# Altium PCB SAST_PCB_V2B_Test_Beta_Sensors_2.PcbDoc
Units mil, origin at the board's own origin, x right, y up, seen from the top; angles counter-clockwise.
Board outline 2500 x 2500 mil, 2 copper layers (Top Layer, Bottom Layer); 26 components, 19 nets, 101 pads, 5 vias.
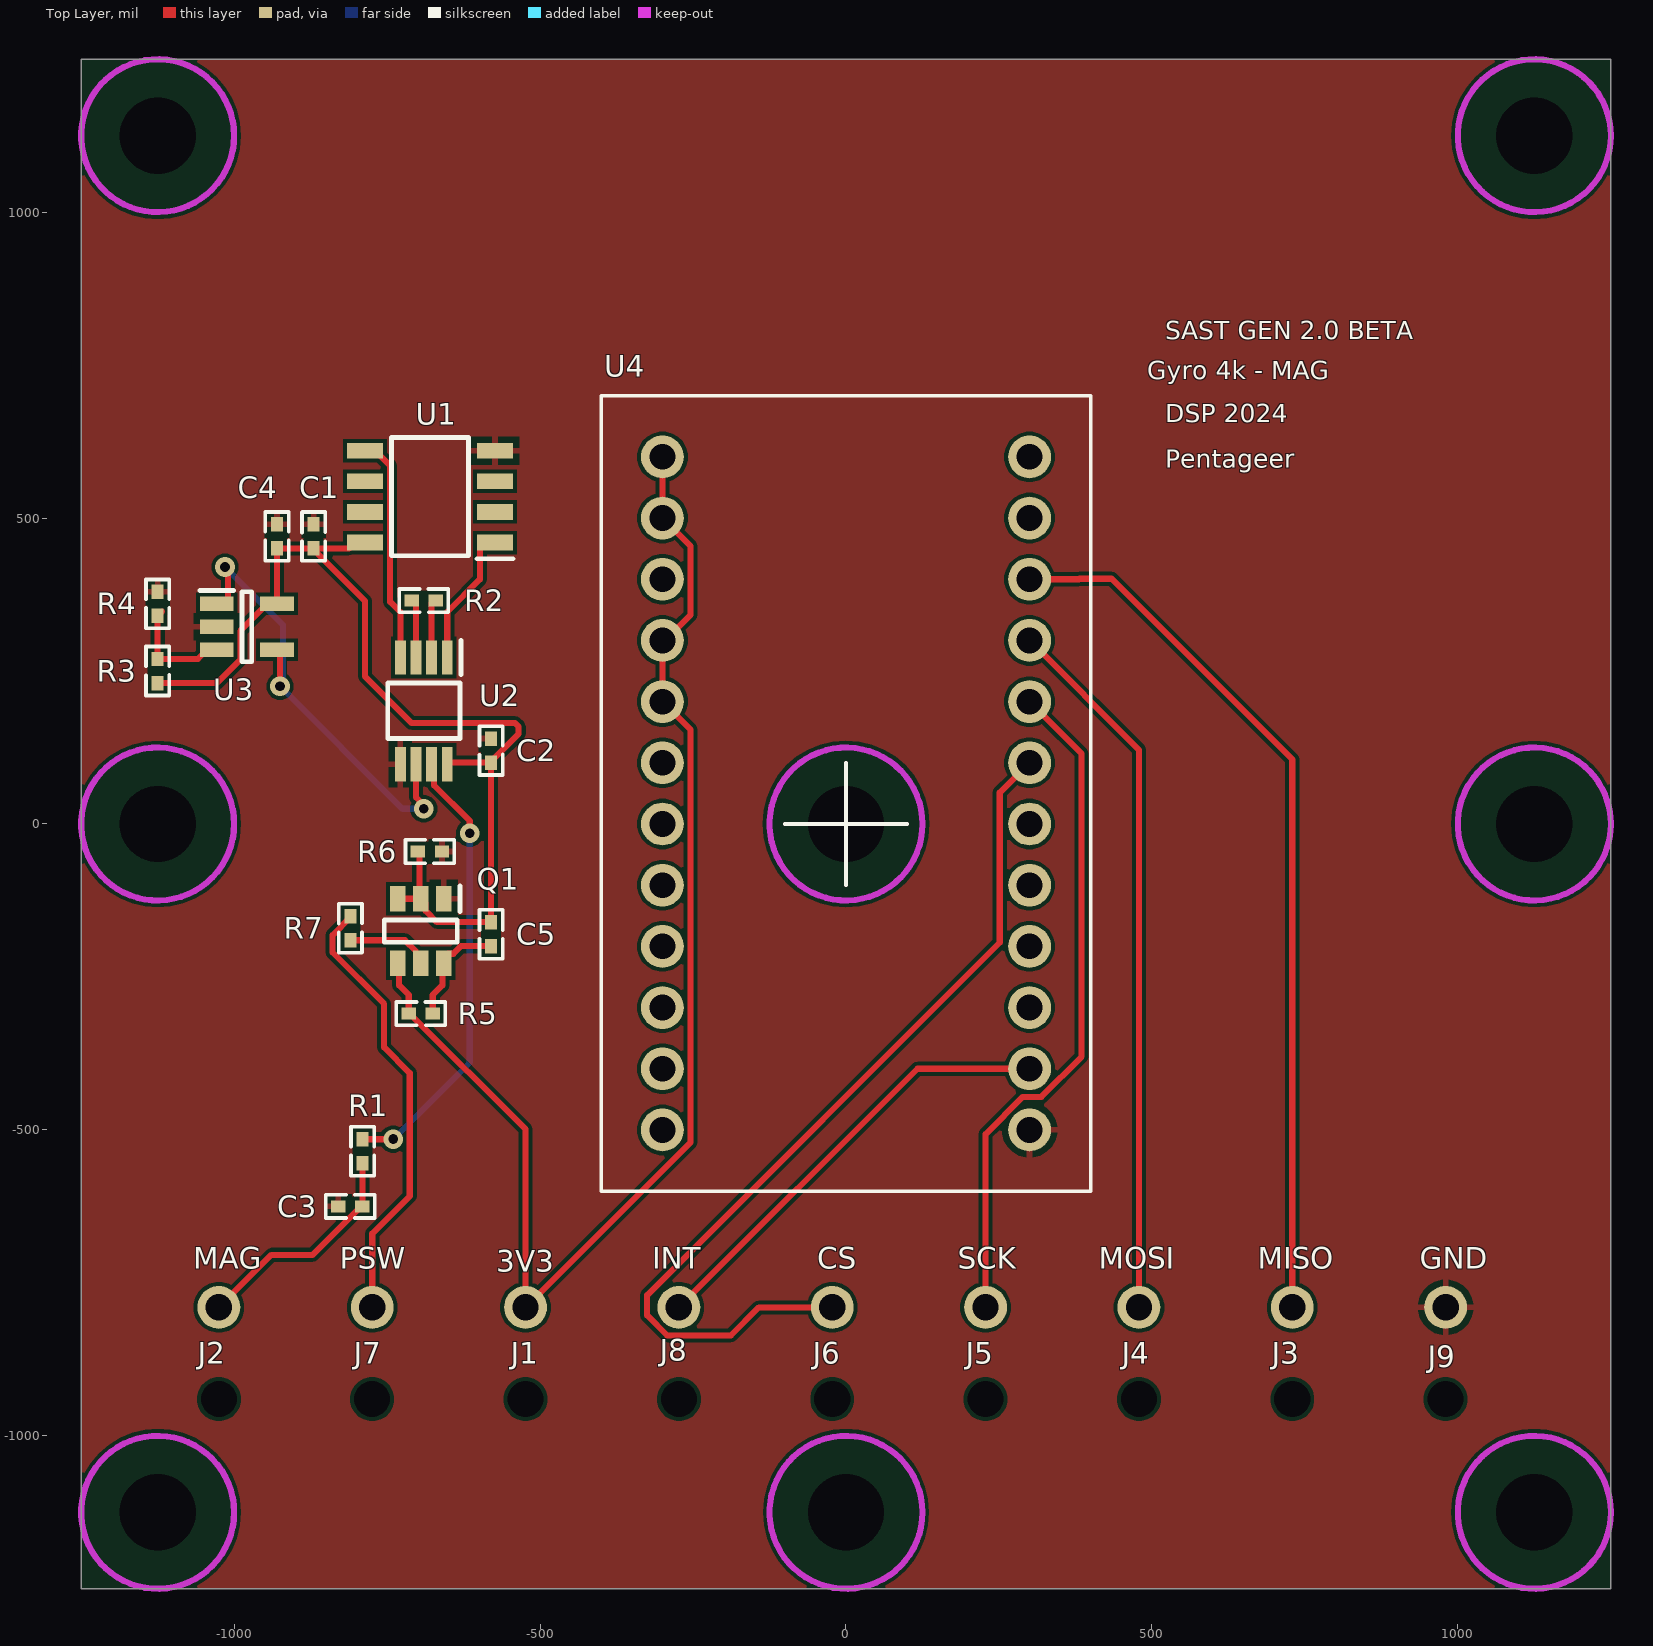
[diagram p0: Top Layer view]
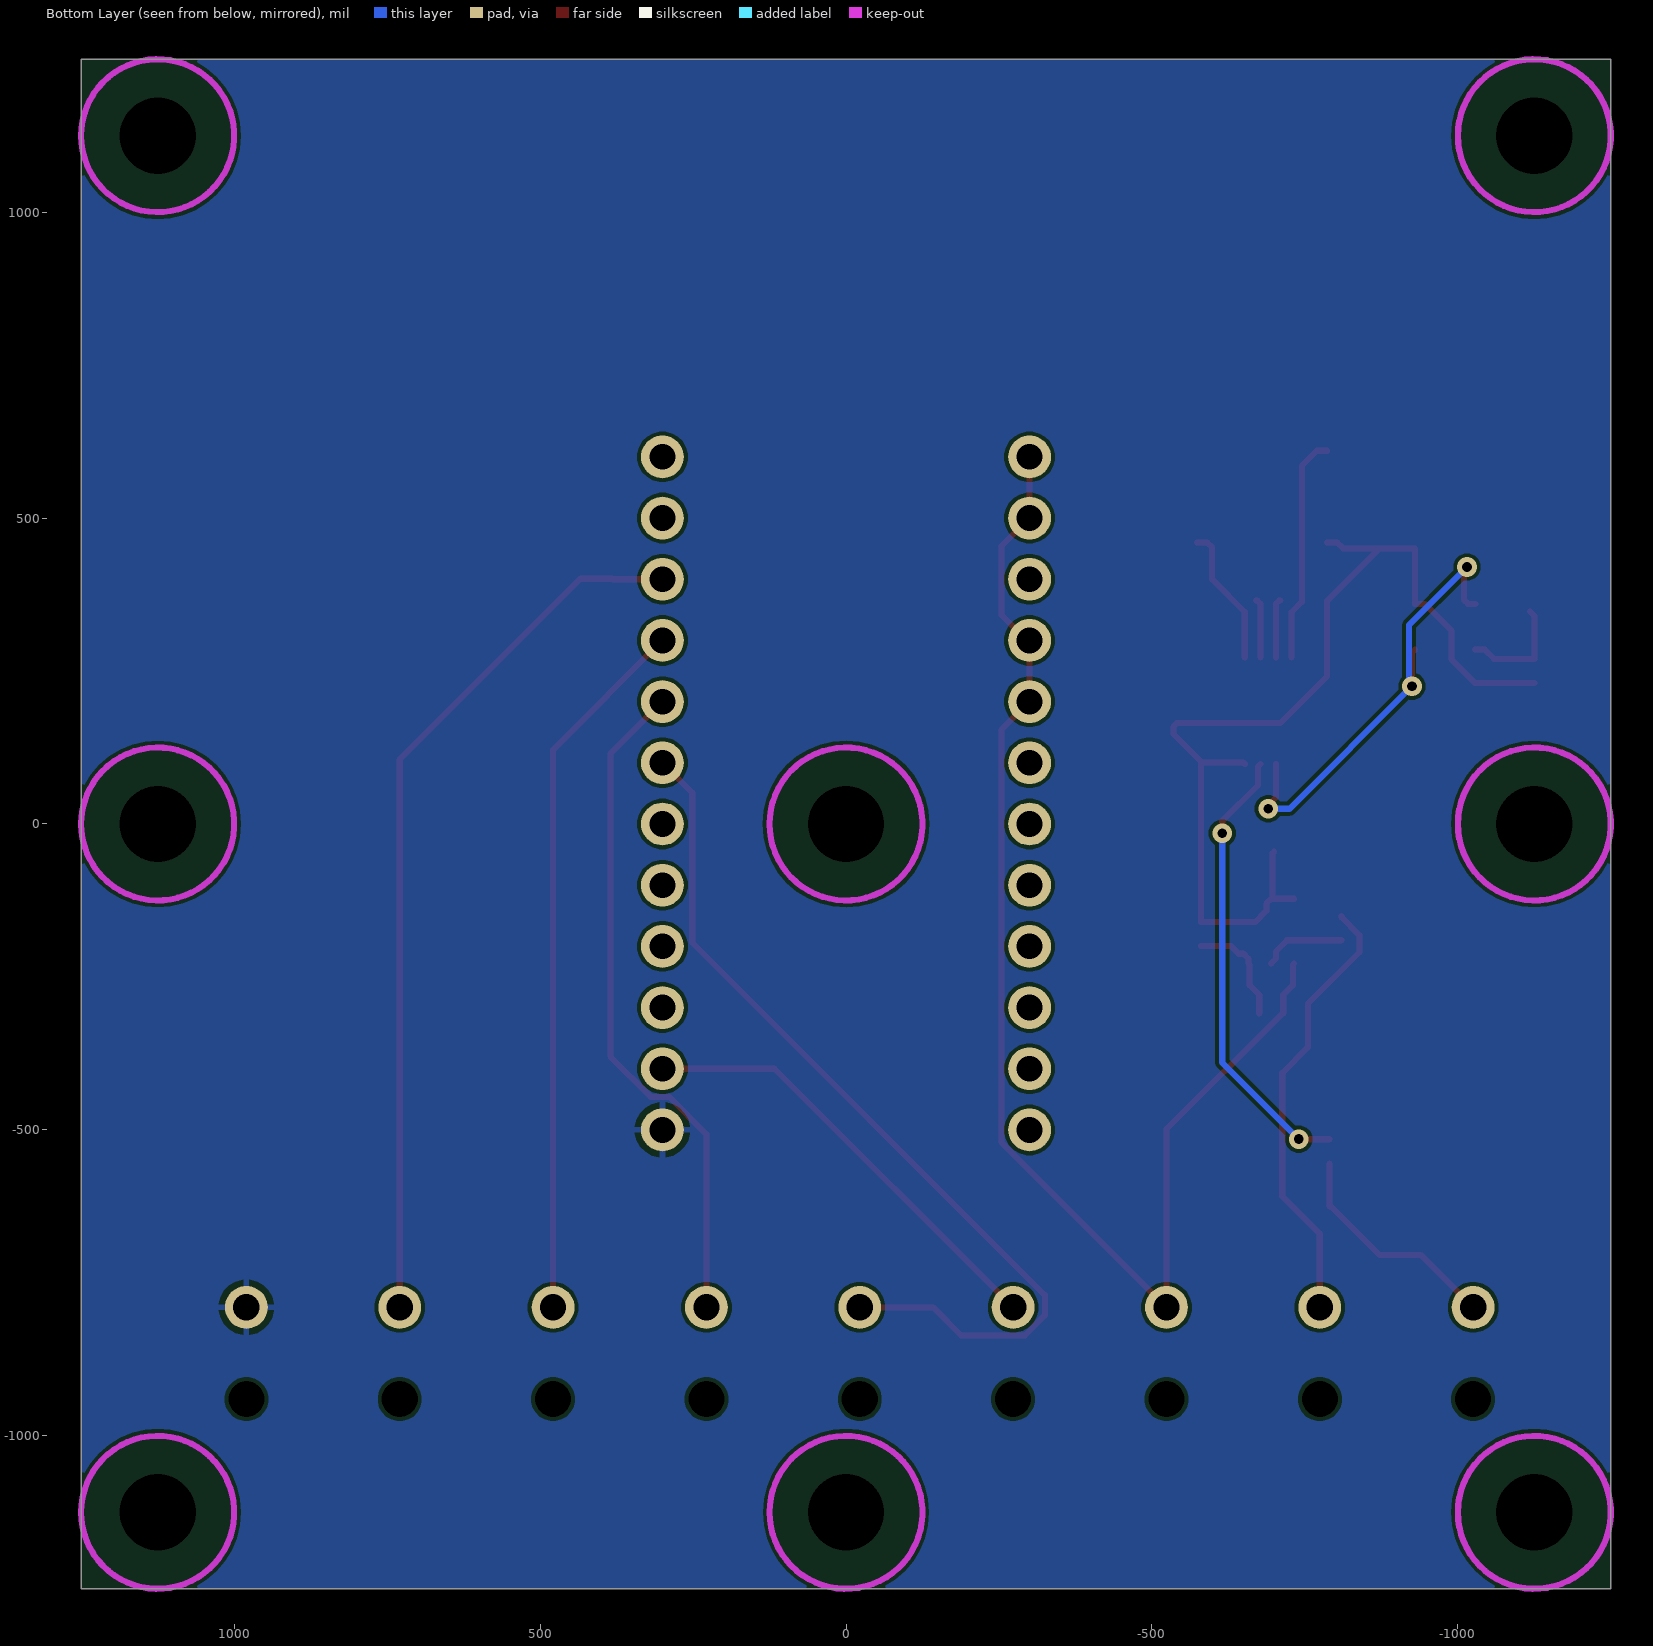
[diagram p1: Bottom Layer view, seen from below]

## Layer stack, top to bottom
Top Solder: solder mask 0.4, Solder Resist, Dk 3.5
Top Layer: signal copper 1.4
Dielectric 1: dielectric 12.6, FR-4, Dk 4.8
Bottom Layer: signal copper 1.4
Bottom Solder: solder mask 0.4, Solder Resist, Dk 3.5

## Board outline
-1250,-1250 -1250,1250 1250,1250 1250,-1250

## Design rules (kind name [scope] priority, off if disabled: settings)
Clearance [All] p1: gap=6 ignorepadtopadclearanceinfootprint=FALSE
HoleSize [All] p1: absolutevalues=TRUE maxlimit=150 minlimit=1 maxpercent=80.000 minpercent=20.000
MinimumSolderMaskSliver [All] p1: minsoldermaskwidth=4
PolygonConnect [All] p1: connectstyle=Relief reliefconductorwidth=10 reliefentries=4 polygonreliefangle="90 Angle" airgapwidth=10
RoutingVias [All] p1: holewidth=16 width=32 viastyle="Through Hole" minholewidth=12 minwidth=30 maxholewidth=28 maxwidth=50
SilkToSilkClearance [All] p1: silktosilkclearance=4
SilkToSolderMaskClearance [IsPad] p1: minsilkscreentomaskgap=4 clearancetoexposedcopper=TRUE
SolderMaskExpansion [All] p1: expansion=4 istentingtop=FALSE
Width [All] p1: maxlimit=10 minlimit=10 preferedwidth=10
26 further rules are at their usual default settings.

## Components (designator, comment, footprint, x,y, rotation, side; value= is the part's Value field where it differs from the comment)
C1 "CAP CER .1UF 10V X8M 0201" 0402_DSP -870,470 r270 top value=0.1uF
C2 "CAP CER .1UF 10V X8M 0201" 0402_DSP -580,120 r90 top value=0.1uF
C3 "CAP CER 1000PF 50V X8L 0402" 0402_DSP -810.32,-625 r0 top value=1000pF
C4 "CAP CER .1UF 10V X8M 0201" 0402_DSP -930,470 r90 top value=0.1uF
C5 "CAP CER 1000PF 50V X8L 0402" 0402_DSP -580,-180 r270 top value=1000pF
J1 "" Wire24Awg2x1HPAD -523.75,-790 r270 top
J2 "" Wire24Awg2x1HPAD -1025,-790 r270 top
J3 "" Wire24Awg2x1HPAD 729.38,-790 r270 top
J4 "" Wire24Awg2x1HPAD 478.75,-790 r270 top
J5 "" Wire24Awg2x1HPAD 228.12,-790 r270 top
J6 "" Wire24Awg2x1HPAD -22.5,-790 r270 top
J7 "" Wire24Awg2x1HPAD -774.38,-790 r270 top
J8 "" Wire24Awg2x1HPAD -273.12,-790 r270 top
J9 "" Wire24Awg2x1HPAD 980,-790 r270 top
Q1 "SI3865DDV-T1-GE3" SOP95P284X110-6N -695,-175 r270 top
R1 "" 0402_DSP -790,-535 r90 top value=20
R2 "" 0402_DSP -690,365 r0 top value=2.61k
R3 "0402" 0402_DSP -1125,250 r90 top value=100k
R4 "0402" 0402_DSP -1125,359.68 r90 top value=100k
R5 "" 0402_DSP -695,-310 r0 top value=100k
R6 "" 0402_DSP -680,-45 r180 top value=100k
R7 "" 0402_DSP -810,-170.32 r90 top value=3.3k
U1 "SENSOR Magnetometer WHEAT BRDG 8SOIC" SOIC127P600X175-8N -680,535 r180 top
U2 "IC INST AMP 1 CIRCUIT 8MSOP" SOP65P490X110-8N -690,185 r270 top
U3 "IC OPAMP GP 1 CIRCUIT SOT23-5" SOT95P270X145-5N -979.21,322.4 r0 top
U4 "ASM330LHHXG1TR_EVAL" ASM330LHHX_Eval 0,0 r0 top

## Footprints (in the part's own frame and the unit in brackets; to place one, negate y for a bottom-side part, rotate by r counter-clockwise, add the part's x,y. Pads: shape width x height; smd on the part's side, far side on the other; paste and mask are expansions set on the pad)
0402_DSP [mm]
  rect 0.6x0.5 smd: 1(-0.5,0) 2(0.5,0)
  silkscreen extent -1.02,-0.48 1.02,0.48, body extent -0.55,-0.3 0.55,0.3, height 1.3
ASM330LHHX_Eval [mil]
  round 70 hole 42: 1(-300,600) 2(-300,500) 3(-300,400) 4(-300,300) 5(-300,200) 6(-300,100) 7(-300,0) 8(-300,-100) 9(-300,-200) 10(-300,-300) 11(-300,-400) 12(-300,-500) 13(300,-500) 14(300,-400) 15(300,-300) 16(300,-200) 17(300,-100) 18(300,0) 19(300,100) 20(300,200) 21(300,300) 22(300,400) 23(300,500) 24(300,600)
  silkscreen extent -400,-600 400,700
SOIC127P600X175-8N [mm]
  rect 1.5x0.65 smd: 1(-2.7,1.905) 2(-2.7,0.635) 3(-2.7,-0.635) 4(-2.7,-1.905) 5(2.7,-1.905) 6(2.7,-0.635) 7(2.7,0.635) 8(2.7,1.905)
  silkscreen extent -3.45,-2.45 1.6,2.58, body extent -3,-2.45 3,2.45, height 1.75
SOP65P490X110-8N [mm]
  rect 1.425x0.45 smd: 1(-2.212,0.975) 2(-2.212,0.325) 3(-2.212,-0.325) 4(-2.212,-0.975) 5(2.212,-0.975) 6(2.212,-0.325) 7(2.212,0.325) 8(2.212,0.975)
  silkscreen extent -2.93,-1.5 1.15,1.55, body extent -2.45,-1.5 2.45,1.5, height 1.1
SOP95P284X110-6N [mm]
  rect 1.062x0.65 smd mask+0.076: 1(-1.344,0.95) 2(-1.344,0) 3(-1.344,-0.95) 4(1.344,-0.95) 5(1.344,0) 6(1.344,0.95)
  silkscreen extent -1.88,-1.51 0.46,1.63, body extent -1.42,-1.51 1.42,1.51, height 1.1
SOT95P270X145-5N [mm]
  rect 1.4x0.6 smd: 1(-1.25,0.95) 2(-1.25,0) 3(-1.25,-0.95) 4(1.25,-0.95) 5(1.25,0.95)
  silkscreen extent -1.95,-1.45 0.2,1.5, body extent -1.35,-1.45 1.35,1.45, height 1.45
Wire24Awg2x1HPAD [mil]
  round 70 hole 43: 1(0,0)
  round 0 hole 59 unplated: ""(150,0)

## Part data
C1 C2 C4: library part GCM033M8ED104KE07J, "Capacitor: 0.1 µF ±10% 10V Ceramic Capacitor X8M 0201", Case/Package=0402, Manufacturer_Name="Murata Electronics", Mouser Part Number=81-GCM033M8ED104KE07, Voltage=10V, Datasheet Link=https://search.murata.co.jp/Ceramy/image/img/A01X/G101/ENG/GCM033M8ED104KE07-01A.pdf, Height=0.33mm, Manufacturer_Part_Number=GCM033M8ED104KE07J, Mouser Price/Stock=https://www.mouser.co.uk/ProductDetail/Murata-Electronics/GCM033M8ED104KE07J?qs=xZFQr2mActesc5d29hjXRw%3D%3D
C3 C5: library part GCM155L81H102KA37D, "Capacitor: 1000 pF ±10% 50V Ceramic Capacitor X8L 0402 (1005 Metric)", Case/Package=0402, Manufacturer_Name="Murata Electronics", Mouser Part Number=81-GCM155L81H102KA7D, Voltage=50V, Arrow Part Number=GCM155L81H102KA37D, Arrow Price/Stock=https://www.arrow.com/en/products/gcm155l81h102ka37d/murata-manufacturing?region=nac, Datasheet Link=https://componentsearchengine.com/Datasheets/2/GCM155L81H102KA37D.pdf, Height=0.55mm, Manufacturer_Part_Number=GCM155L81H102KA37D, Mouser Price/Stock=https://www.mouser.co.uk/ProductDetail/Murata-Electronics/GCM155L81H102KA37D?qs=ui%252B2d9lVEI6nM018NUOqBg%3D%3D
J1 J2 J3 J4 J5 J6 J7 J8 J9: library part Socket, "Socket", LatestRevisionDate=17-Jul-2002, LatestRevisionNote="Re-released for DXP Platform.", Publisher="Altium Limited"
Q1: "Transistor", Manufacturer_Name=Vishay, Mouser Part Number=78-SI3865DDV-T1-GE3, Arrow Part Number=SI3865DDV-T1-GE3, Arrow Price/Stock=https://www.arrow.com/en/products/si3865ddv-t1-ge3/vishay, Datasheet Link=https://componentsearchengine.com/Datasheets/2/SI3865DDV-T1-GE3.pdf, Height=1.1mm, Manufacturer_Part_Number=SI3865DDV-T1-GE3, Mouser Price/Stock=https://www.mouser.co.uk/ProductDetail/Vishay-Semiconductors/SI3865DDV-T1-GE3?qs=vuqggo%252BeDiBbC6kpjqT%2F2w%3D%3D
R1: library part "Resistor 0402", Case/Package=0402, Manufacturer_Name="Vishay / Dale", Supplier_Name=Mouser
R2: library part "Resistor 0402", Case/Package=0402
R3 R4: library part "Resistor 0402", Manufacturer_Name="Vishay / Dale", Tolerance=0.1%, Supplier_Name=Mouser
R5 R6 R7: library part "Resistor 0402", Case/Package=0402, Manufacturer_Name="Vishay / Dale", Manufacturer_Part_Number=CRCW0402100KFKEDC, Supplier_Name=Mouser, Supplier_Part_Number=71-CRCW0402100KFKEDC
U1: library part AAH002-02E, "Integrated Circuit: Magnetoresistive Sensor Single Axis 8-SOIC", Manufacturer_Part_Name="NVE Corp/Sensor Products", Manufacturer_Part_Number=AAH002-02E, Supplier=Digikey, Supplier_Part_Number=391-1046-5-ND
U2: library part AD8226BRMZ-R7, "Integrated Circuit: Instrumentation Amplifier 1 Circuit Rail-to-Rail 8-MSOP", Manufacturer_Name="Analog Devices", Mouser Part Number=584-AD8226BRMZ-R7, Arrow Part Number=AD8226BRMZ-R7, Arrow Price/Stock=https://www.arrow.com/en/products/ad8226brmz-r7/analog-devices?region=nac, Datasheet Link=https://componentsearchengine.com/Datasheets/1/AD8226BRMZ-R7.pdf, Height=1.1mm, Manufacturer_Part_Number=AD8226BRMZ-R7, Mouser Price/Stock=https://www.mouser.co.uk/ProductDetail/Analog-Devices/AD8226BRMZ-R7?qs=%2FtpEQrCGXCy0K1MIqqlxxw%3D%3D
U3: library part MCP6401T-E_OT, "Integrated Circuit: General Purpose Amplifier 1 Circuit Rail-to-Rail SOT-23-5", Arrow Part Number=MCP6401T-E/OT, Manufacturer_Name=Microchip, Mouser Part Number=579-MCP6401T-E/OT, Arrow Price/Stock=https://www.arrow.com/en/products/mcp6401t-eot/microchip-technology?region=nac, Datasheet Link=https://componentsearchengine.com/Datasheets/2/MCP6401T-E_OT.pdf, Height=1.45mm, Manufacturer_Part_Number=MCP6401T-E/OT, Mouser Price/Stock=https://www.mouser.co.uk/ProductDetail/Microchip-Technology-Atmel/MCP6401T-E-OT?qs=bxUt0k7cytKn2ZddhA6TyA%3D%3D

## Free pads (board coordinates)
  round 0 hole 125 unplated: ""(-1125,-1125) ""(-1125,0) ""(-1125,1125) ""(0,-1125) ""(0,0) ""(1125,-1125) ""(1125,0) ""(1125,1125)

## Via types
v1: diameter 32, hole 16, Top Layer to Bottom Layer, tented both sides, 5 vias

## Nets (pads, with @x,y where several pads share a name; then routed paths per layer and width w, separated by ;. In a path a pad name is that pad's centre, name@x,y a point inside that pad or via, vN(x,y) a via of type N, cw(c..) or ccw(c..) an arc to the next point about the centre after c; other vN are vias at no path point)
3V3: J1.1 Q1.4 R5.1 U4.1 U4.2 U4.4 U4.5 | length 2211
  Top Layer w10: Q1.4 -730.31,-230 -730.31,-263.82 -714.68,-279.45 R5.1 -712.72,-310 -523.75,-498.97 J1.1 -254,-520.25 -254,154 U4.5 U4.4 -295.77,300 -254,341.77 -254,454 U4.2 U4.1
3V3_MAG_2: C1.2 C2.1 C4.1 C5.1 Q1.2 Q1.3 R3.1 R6.2 U1.8 U2.8 U3.5 | length 1708.4
  Top Layer w10: R3.1 -1028.18,230.32 -989.87,268.63 -989.87,315.69 -945.75,359.8 U3.5 C4.1 C1.2 ; U1.8 -803.03,460 -812.72,450.31 C1.2 ; Q1.3 Q1.2 ; R6.2 -697.34,-47.34 -697.34,-119.74 Q1.2 ; U2.8 -649.21,100.32 C2.1 ; C1.2 -870,448.35 -786.3,364.65 -786.3,241.3 -710,165 -540.86,165 -535,159.14 -535,147.28 -580,102.28 C2.1 ; Q1.2 -687.2,-129.88 -687.2,-141.74 -668.63,-160.32 C5.1 C2.1
CS_4K_Gyro: J6.1 U4.19 | length 1497.2
  Top Layer w10: J6.1 -142.46,-790 -188.46,-836 -292.18,-836 -325,-803.18 -325,-770 251.33,-193.67 251.33,51.33 U4.19
GND: C1.1 C2.2 C3.1 C4.2 J9.1 Q1.1 R4.2 R6.1 U1.4 U2.5 U3.2 U4.13
Int_4K_Gyro: J8.1 U4.14 | length 734.7
  Top Layer w10: J8.1 116.88,-400 U4.14
MAG_ANAL_2: C3.2 J2.1 R1.1 | length 373.3
  Top Layer w10: J2.1 -939.18,-704.18 -871.78,-704.18 -792.6,-625 C3.2 -790.32,-624.69 -790.32,-555 R1.1
MISO2: J3.1 U4.22 | length 1447.6
  Top Layer w10: U4.22 380.5,400 381.36,400.86 434.14,400.86 729.38,105.62 J3.1
MOSI2: J4.1 U4.21 | length 1164
  Top Layer w10: U4.21 478.75,121.25 J4.1
NetC5_2: C5.2 Q1.6 R5.2 | length 183.5
  Top Layer w10: R5.2 -675.31,-279.45 -659.69,-263.82 -659.69,-230 Q1.6 -657.6,-219.8 -649.8,-212.01 -641.69,-212.01 -629.37,-199.69 C5.2
NetQ1_5: Q1.5 R7.1 | length 137.6
  Top Layer w10: R7.1 -721.06,-190 -702.8,-208.26 -702.8,-220.12 Q1.5
NetR1_2: R1.2 U2.7 | length 740.6
  Top Layer w10: R1.2 -789.84,-515.16 -740.16,-515.16 v1(-740,-515) ; U2.7 -673.35,94.06 -673.35,63.35 -615,5 v1(-615,-15)
  Bottom Layer w10: v1(-740,-515) -615,-390 v1(-615,-15)
NetR2_1: R2.1 U2.3 | length 96.9
  Top Layer w10: R2.1 -707.72,365 -702.8,360.08 U2.3
NetR2_2: R2.2 U2.2 | length 96.9
  Top Layer w10: U2.2 -677.2,360.08 -672.28,365 R2.2
NetR3_2: R3.2 R4.1 U3.3 | length 183.7
  Top Layer w10: R4.1@-1117.61,347.39 R4.1 R3.2 -1059.49,269.69 -1044.17,285 U3.3
NetU1_1: U1.1 U2.1 | length 230
  Top Layer w10: U2.1 -651.61,346.49 -598.23,399.88 -598.23,452.2 -590.43,460 U1.1
NetU1_5: U1.5 U2.4 | length 371.7
  Top Layer w10: U1.5 -769.57,610 -745.08,585.51 -745.08,363.18 -728.39,346.49 U2.4
NetU2_6: U2.6 U3.1 U3.4 | length 774.2
  Top Layer w10: U3.1 -1016.81,359.8 -1010,366.61 -1010,415 v1(-1015,420) ; U3.4 -925,280 v1(-925,225) ; U2.6 -702.8,43.75 -690,30.95 v1(-690,25)
  Bottom Layer w10: v1(-1015,420) -1010,420 -1010,415 -920,325 -920,235 -925,230 v1(-925,225) -725,25 v1(-690,25)
POWER_SW: J7.1 R7.2 | length 729
  Top Layer w10: R7.2 -810,-152.6 -839,-181.6 -839,-210 -755,-294 -755,-365 -713,-407 -713,-608.1 -774.38,-669.48 J7.1
SCK2: J5.1 U4.20 | length 1107.8
  Top Layer w10: J5.1 228.12,-506.82 288.95,-446 319.05,-446 385,-380.05 385,115 U4.20
pads on no net: J1. J2. J3. J4. J5. J6. J7. J8. J9. U1.2 U1.3 U1.6 U1.7 U4.3 U4.6 U4.7 U4.8 U4.9 U4.10 U4.11 U4.12 U4.15 U4.16 U4.17 U4.18 U4.23 U4.24

## Polygon pours and split planes (outlines as drawn)
GND on Bottom Layer "GND_L02_P001" (solid, remove dead copper, pour order 1): -1250,-1250 1250,-1250 1250,1250 -1250,1250
GND on Top Layer "GND_L01_P000" (solid, remove dead copper, pour order 0): -1250,-1250 1250,-1250 1250,1250 -1250,1250

## Keep-outs
Top Layer:
  circle w10: c0,-1125 r125
  circle w10: c1125,-1125 r125
  circle w10: c1125,0 r125
  circle w10: c1125,1125 r125
  circle w10: c0,0 r125
  circle w10: c-1125,1125 r125
  circle w10: c-1125,0 r125
  circle w10: c-1125,-1125 r125
Bottom Layer:
  circle w10: c0,-1125 r125
  circle w10: c1125,-1125 r125
  circle w10: c1125,0 r125
  circle w10: c1125,1125 r125
  circle w10: c0,0 r125
  circle w10: c-1125,1125 r125
  circle w10: c-1125,0 r125
  circle w10: c-1125,-1125 r125

## Silkscreen, mask and mechanical layers (free items; w line width, h text height)
Top Overlay:
  text "SAST GEN 2.0 BETA" at 522,792 h30
  text "Gyro 4k - MAG" at 492,727 h30
  text "DSP 2024" at 522,657 h30
  text "Pentageer" at 522,582 h30
  text "MAG" at -1067,-727 h35
  text "PSW" at -827,-727 h35
  text "INT" at -317,-727 h35
  text "CS" at -47,-727 h35
  text "SCK" at 183,-727 h35
  text "MOSI" at 413,-727 h35
  text "MISO" at 673,-727 h35
  text "GND" at 938,-727 h35
  text "3V3" at -572,-732 h35
Board:
  lines w6: -1250,0 1250,0 ; 0,-1250 0,1250 ; -1250,-1250 735,-1250 1250,-1250 1250,1250 -1250,1250 -1250,-1250